# EAGLE board blimpy-1.0-B (EAGLE 9.5.0)
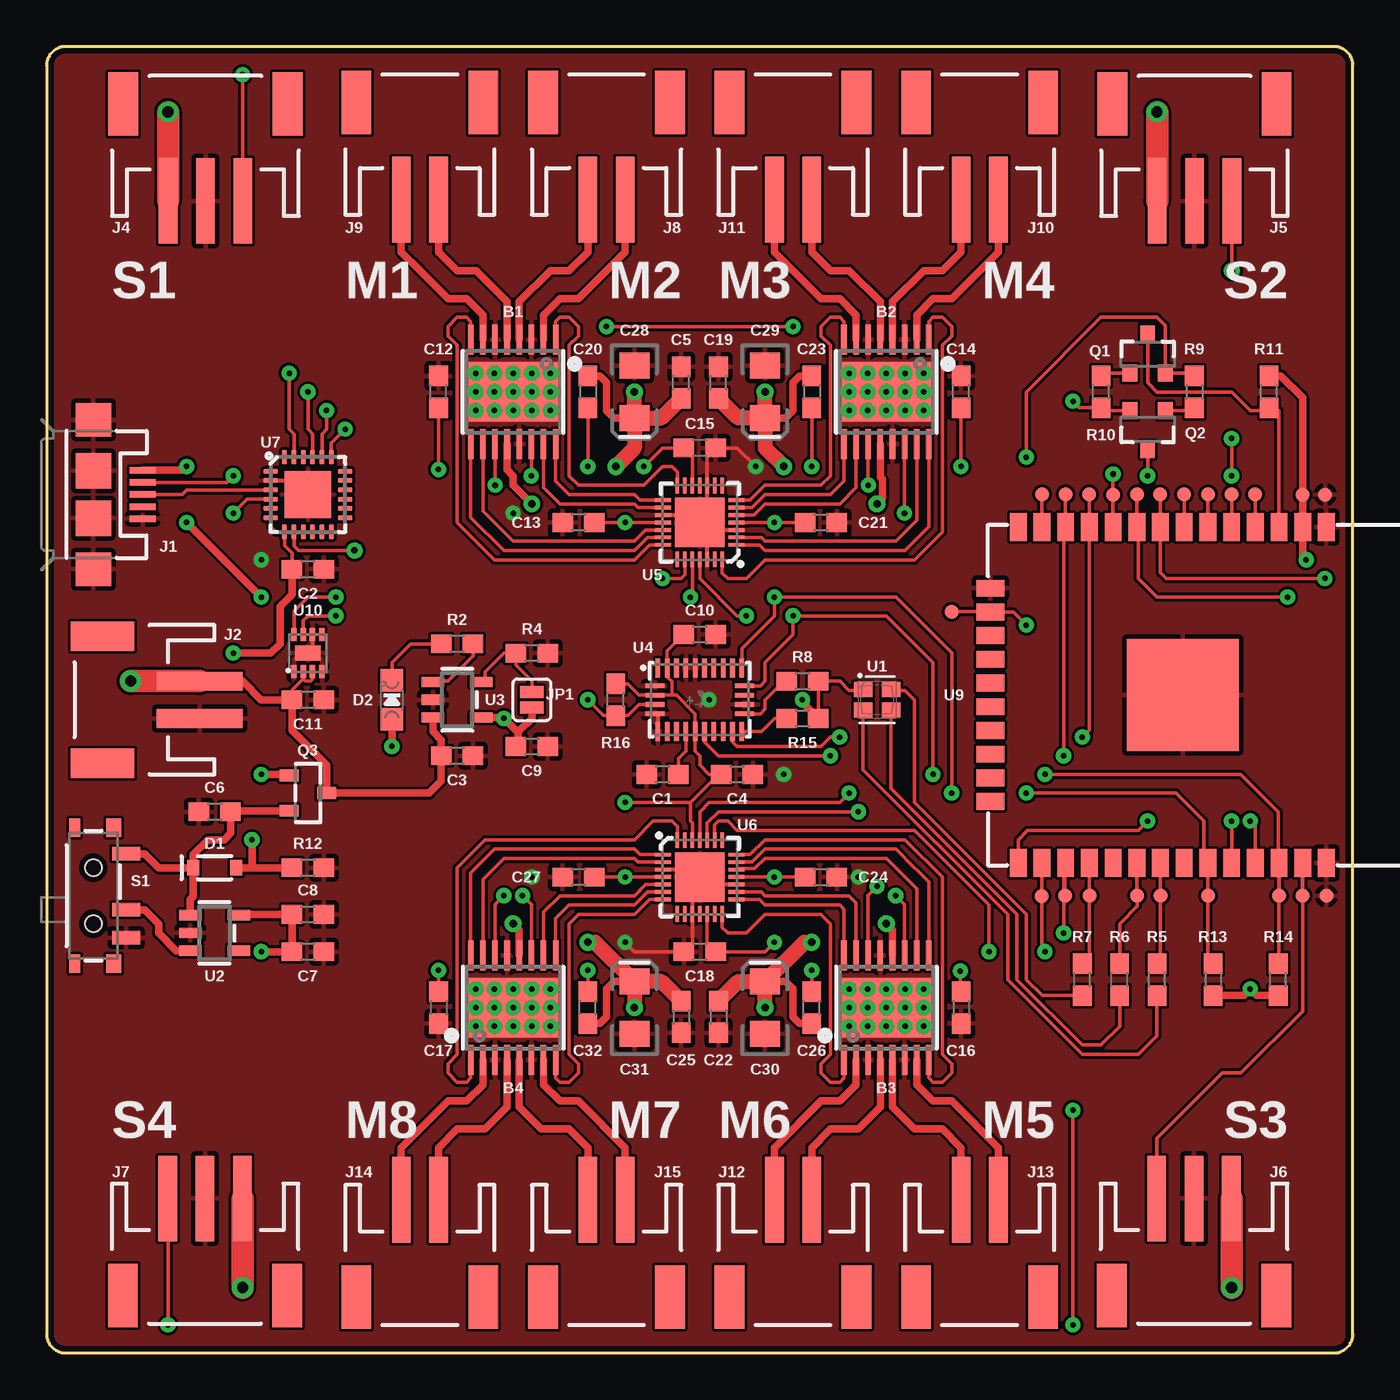
[diagram p0: board, top side]
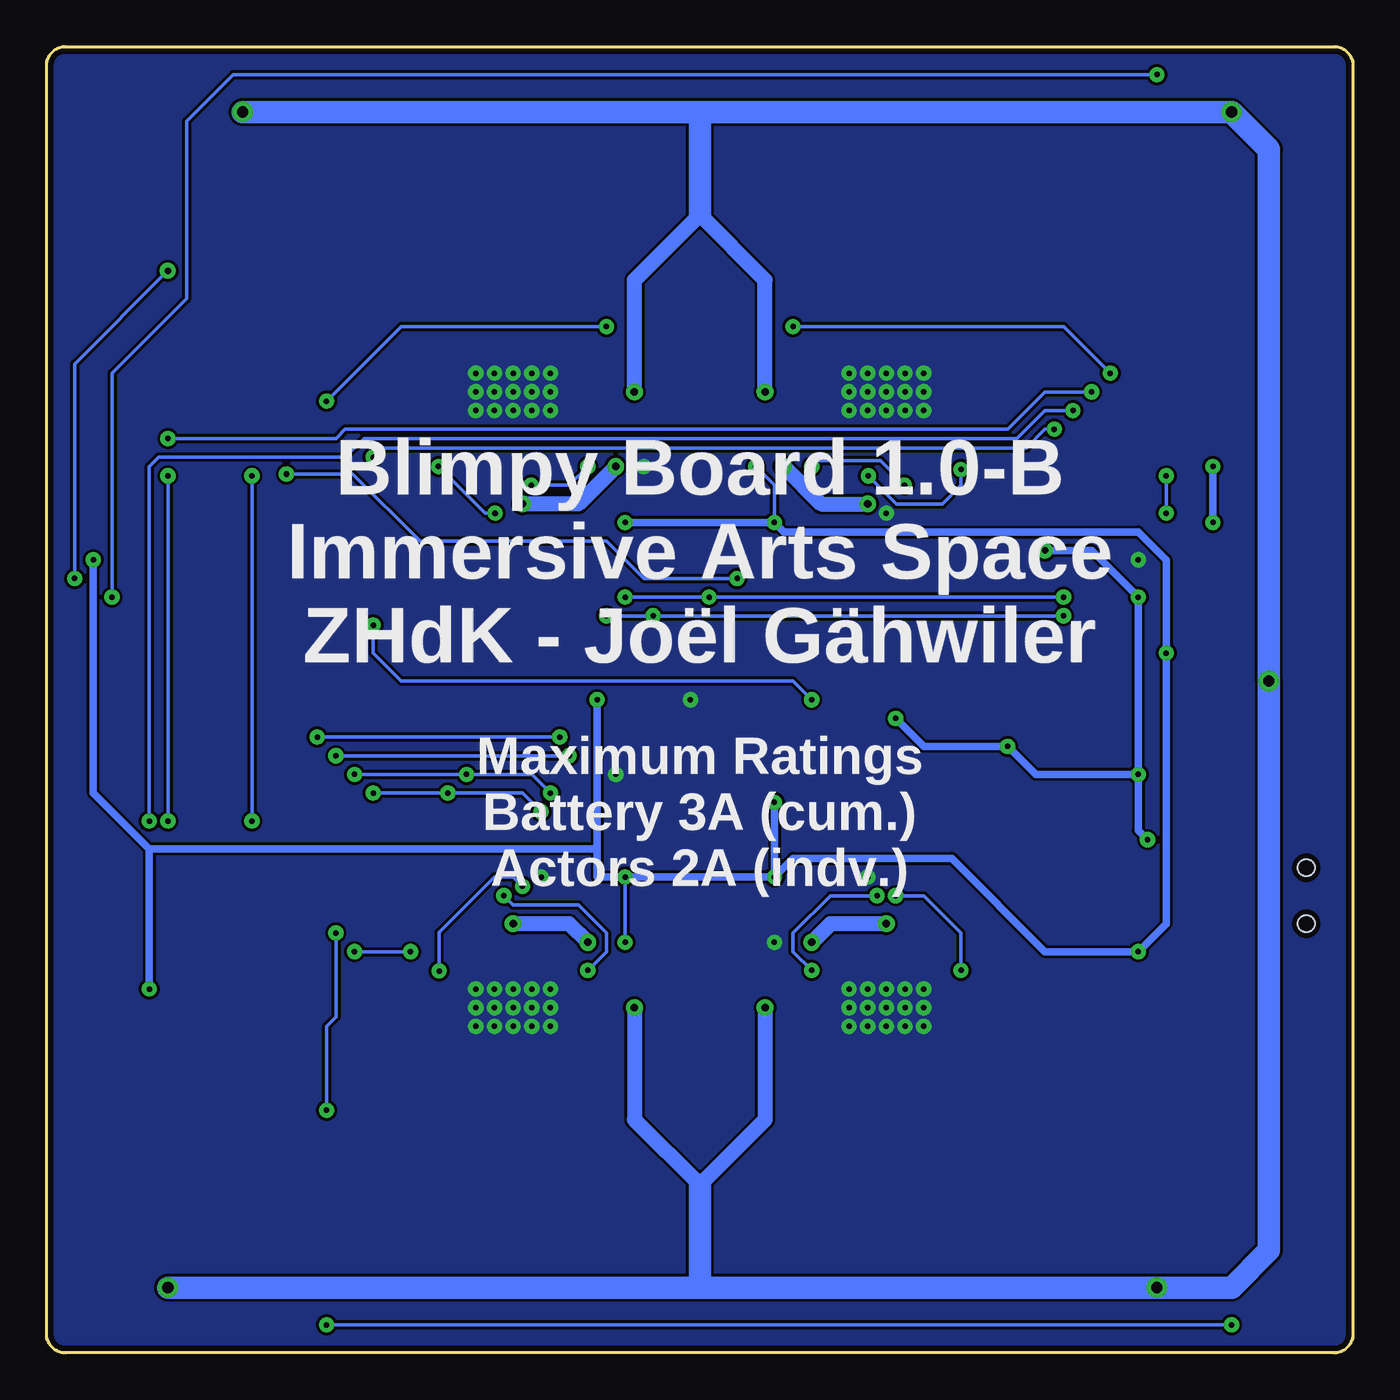
[diagram p1: board, bottom side, seen from below]

Size 70 x 70 mm. Coordinates in mm from the lower left corner, seen from the top.
Outline: 69,0 arc90 70,1 70,69 arc90 69,70 1,70 arc90 0,69 0,1 arc90 1,0 69,0
Copper layers (1*16): Top 0.035mm / dielectric 1mm / Bottom 0.035mm
Design rules "SparkFun-2-layer-STANDARD *": minimum track width 6mil, minimum drill 0.3mm, track to track 6mil, track to pad 6mil, pad to pad 6mil, via to via 6mil, smd to smd 6mil, copper to edge 12mil, drill to drill 12mil, minimum pad ring 10mil, minimum via ring 10mil, stop-mask expansion 4mil, vias tented up to drill 25mil, thermal gap 10mil

## Footprints (pad centres in the part's own frame; a part is rotated, then mirrored left to right if it is on the bottom)
HTSSOP16 = smd 0.3 x 1.6: 1 -2.275,-2.8; 2 -1.625,-2.8; 3 -0.975,-2.8; 4 -0.325,-2.8; 5 0.325,-2.8; 6 0.975,-2.8; 7 1.625,-2.8; 8 2.275,-2.8; 9 2.275,2.8; 10 1.625,2.8; 11 0.975,2.8; 12 0.325,2.8; 13 -0.325,2.8; 14 -0.975,2.8; 15 -1.625,2.8; 16 -2.275,2.8 | smd 4.8 x 3.2: PPAD 0,0
0603 = smd 1.1 x 1: 1 -0.85,0; 2 0.85,0
EIA3216 = smd 1.4 x 1.6: + 1.4,0; - -1.4,0
SOD-323 = smd 0.63 x 0.83: A 1.15,0; C -1.15,0
CHIPLED_0805_NOOUTLINE = smd 1.2 x 1.2: A 0,-1.05; C 0,1.05
USB-MICROB = smd 1.4 x 0.35: D+ -2.65,0; D- -2.65,-0.65; GND -2.65,1.3; ID -2.65,0.65; VBUS -2.65,-1.3 | smd 1.9 x 1.8: MT1 0,-4; MT2 0,4 | smd 1.9 x 1.9: P$1 0,-1.27; P$2 0,1.27
JST-2-SMD = smd 1 x 4.6: 1 -1,-3.7; 2 1,-3.7 | smd 1.6 x 3.4: NC1 -3.4,1.5; NC2 3.4,1.5
JST-3-SMD = smd 1 x 4.6: 1 -1.99,-4.77; 2 0.01,-4.77; 3 2.01,-4.77 | smd 1.6 x 3.4: NC1 -4.39,0.43; NC2 4.41,0.43
SMT-JUMPER_2_NO_SILK = smd 0.635 x 1.27: 1 -0.406,0; 2 0.406,0
SOT23-3 = smd 0.8 x 0.9: 1 -0.95,-1; 2 0.95,-1; 3 0,1.1
SOT23-R = smd 0.635 x 1.016: 1 -0.95,-1; 2 0.95,-1; 3 0,1
SWITCH_SPST_SMD_A = smd 0.7 x 1.5: 1 -2.25,-1.75; 2 -0.75,-1.75; 3 2.25,-1.75 | smd 1 x 0.6: GND1 -3.65,1; GND3 3.65,1 | smd 1 x 0.8: GND2 -3.65,-1.1; GND4 3.65,-1.1 | hole 0.9: -1.5,0; 1.5,0
PAD.03X.03 = smd 0.762 x 0.762: P$1 0,0
PLCC4-2MM-RGB = smd 1 x 0.8: BLUE -0.75,-0.55; CA 0.75,-0.55; GREEN -0.75,0.55; RED 0.75,0.55
SOT23-5 = smd 0.55 x 1.2: 1 -0.95,-1.3; 2 0,-1.3; 3 0.95,-1.3; 4 0.95,1.3; 5 -0.95,1.3
LGA-28 = smd 1 x 0.25: 1 1.7,2.25; 6 -1.7,2.25; 7 -1.7,1.75; 8 -1.7,1.25; 9 -1.7,0.75; 10 -1.7,0.25; 11 -1.7,-0.25; 12 -1.7,-0.75; 13 -1.7,-1.25; 14 -1.7,-1.75; 15 -1.7,-2.25; 20 1.7,-2.25; 21 1.7,-1.75; 22 1.7,-1.25; 23 1.7,-0.75; 24 1.7,-0.25; 25 1.7,0.25; 26 1.7,0.75; 27 1.7,1.25; 28 1.7,1.75 | smd 0.25 x 1: 2 0.75,2.4; 3 0.25,2.4; 4 -0.25,2.4; 5 -0.75,2.4; 16 -0.75,-2.4; 17 -0.25,-2.4; 18 0.25,-2.4; 19 0.75,-2.4
QFN-28 = smd 0.85 x 0.2: 1 -1.975,1.2; 2 -1.975,0.8; 3 -1.975,0.4; 4 -1.975,0; 5 -1.975,-0.4; 6 -1.975,-0.8; 7 -1.975,-1.2; 15 1.975,-1.2; 16 1.975,-0.8; 17 1.975,-0.4; 18 1.975,0; 19 1.975,0.4; 20 1.975,0.8; 21 1.975,1.2 | smd 0.2 x 0.85: 8 -1.2,-1.975; 9 -0.8,-1.975; 10 -0.4,-1.975; 11 0,-1.975; 12 0.4,-1.975; 13 0.8,-1.975; 14 1.2,-1.975; 22 1.2,1.975; 23 0.8,1.975; 24 0.4,1.975; 25 0,1.975; 26 -0.4,1.975; 27 -0.8,1.975; 28 -1.2,1.975 | smd 2.65 x 2.65: 29 0,0
QFN24_4MM_SMSC = smd 0.8 x 0.28: 1 -2,1.25; 2 -2,0.75; 3 -2,0.25; 4 -2,-0.25; 5 -2,-0.75; 6 -2,-1.25; 13 2,-1.25; 14 2,-0.75; 15 2,-0.25; 16 2,0.25; 17 2,0.75; 18 2,1.25 | smd 0.28 x 0.8: 7 -1.25,-2; 8 -0.75,-2; 9 -0.25,-2; 10 0.25,-2; 11 0.75,-2; 12 1.25,-2; 19 1.25,2; 20 0.75,2; 21 0.25,2; 22 -0.25,2; 23 -0.75,2; 24 -1.25,2 | smd 2.5 x 2.5: THERM 0,0
ESP-WROOM-32 = smd 0.9 x 1.5: 1 7.7,9; 2 6.43,9; 3 5.16,9; 4 3.89,9; 5 2.62,9; 6 1.35,9; 7 0.08,9; 8 -1.19,9; 9 -2.46,9; 10 -3.73,9; 11 -5,9; 12 -6.27,9; 13 -7.54,9; 14 -8.81,9; 25 -8.81,-9; 26 -7.54,-9; 27 -6.27,-9; 28 -5,-9; 29 -3.73,-9; 30 -2.46,-9; 31 -1.19,-9; 32 0.08,-9; 33 1.35,-9; 34 2.62,-9; 35 3.89,-9; 36 5.16,-9; 37 6.43,-9; 38 7.7,-9 | smd 1.5 x 0.9: 15 -10.3,5.715; 16 -10.3,4.445; 17 -10.3,3.175; 18 -10.3,1.905; 19 -10.3,0.635; 20 -10.3,-0.635; 21 -10.3,-1.905; 22 -10.3,-3.175; 23 -10.3,-4.445; 24 -10.3,-5.715 | smd 6 x 6: GND 0,0
DFN-8 = smd 0.3 x 0.7: P$1 -0.75,-0.99; P$2 -0.25,-0.99; P$3 0.25,-0.99; P$4 0.75,-0.99; P$5 0.75,0.99; P$6 0.25,0.99; P$7 -0.25,0.99; P$8 -0.75,0.99 | smd 1.38 x 0.8: P$9 0,0

## Placement (x,y rotation side)
B1  DRV8833PWPR  [HTSSOP16]  25,51.5 180 top
B2  DRV8833PWPR  [HTSSOP16]  45,51.5 180 top
B3  DRV8833PWPR  [HTSSOP16]  45,18.5 0 top
B4  DRV8833PWPR  [HTSSOP16]  25,18.5 0 top
C1  0.1uF  [0603]  33,31 180 top
C2  10uF  [0603]  14,42 0 top
C3  10uF  [0603]  22,32 0 top
C4  0.1uF  [0603]  37,31 0 top
C5  0.1uF  [0603]  34,52 90 top
C6  10uF  [0603]  9,29 180 top
C7  1.0uF  [0603]  14,21.5 0 top
C8  10uF  [0603]  14,23.5 0 top
C9  10uF  [0603]  26,32.5 0 top
C10  0.1uF  [0603]  35,38.5 0 top
C11  0.1uF  [0603]  14,35 0 top
C12  10uF  [0603]  21,51.5 90 top
C13  0.1uF  [0603]  28.5,44.5 180 top
C14  10uF  [0603]  49,51.5 90 top
C15  0.1uF  [0603]  35,48.5 0 top
C16  10uF  [0603]  49,18.5 270 top
C17  10uF  [0603]  21,18.5 270 top
C18  0.1uF  [0603]  35,21.5 180 top
C19  0.1uF  [0603]  36,52 90 top
C20  0.1uF  [0603]  29,51.5 270 top
C21  0.1uF  [0603]  41.5,44.5 0 top
C22  0.1uF  [0603]  36,18 270 top
C23  0.1uF  [0603]  41,51.5 270 top
C24  0.1uF  [0603]  41.5,25.5 0 top
C25  0.1uF  [0603]  34,18 270 top
C26  0.1uF  [0603]  41,18.5 90 top
C27  0.1uF  [0603]  28.5,25.5 180 top
C28  10uF  [EIA3216]  31.5,51.5 270 top
C29  10uF  [EIA3216]  38.5,51.5 270 top
C30  10uF  [EIA3216]  38.5,18.5 90 top
C31  10uF  [EIA3216]  31.5,18.5 90 top
C32  0.1uF  [0603]  29,18.5 90 top
D1  1A/23V/620mV  [SOD-323]  9,26 0 top
D2  ORANGE  [CHIPLED_0805_NOOUTLINE]  18.5,35 0 top
J1  MICRO-USB  [USB-MICROB]  2.5,46 180 top
J2  [JST-2-SMD]  4.5,35 90 top
J4  3-PIN SMD  [JST-3-SMD]  8.5,66.5 0 top
J5  3-PIN SMD  [JST-3-SMD]  61.5,66.5 0 top
J6  3-PIN SMD  [JST-3-SMD]  61.5,3.5 180 top
J7  3-PIN SMD  [JST-3-SMD]  8.5,3.5 180 top
J8  [JST-2-SMD]  30,65.5 0 top
J9  [JST-2-SMD]  20,65.5 0 top
J10  [JST-2-SMD]  50,65.5 0 top
J11  [JST-2-SMD]  40,65.5 0 top
J12  [JST-2-SMD]  40,4.5 180 top
J13  [JST-2-SMD]  50,4.5 180 top
J14  [JST-2-SMD]  20,4.5 180 top
J15  [JST-2-SMD]  30,4.5 180 top
JP1  JUMPER-SMT_2_NO_SILK  [SMT-JUMPER_2_NO_SILK]  26,35 270 top
Q1  mmbt2222  [SOT23-3]  59,53.5 0 top
Q2  mmbt2222  [SOT23-3]  59,49.5 180 top
Q3  DMG3415U  [SOT23-R]  14,30 270 top
R2  1k  [0603]  22,38 0 top
R4  2.0k  [0603]  26,37.5 180 top
R5  1k  [0603]  59.5,20 90 top
R6  1k  [0603]  57.5,20 90 top
R7  1k  [0603]  55.5,20 90 top
R8  4.7k  [0603]  40.5,36 0 top
R9  10k  [0603]  61.5,51.5 270 top
R10  10k  [0603]  56.5,51.5 90 top
R11  10k  [0603]  65.5,51.5 90 top
R12  100k  [0603]  14,26 180 top
R13  4.7k  [0603]  62.5,20 270 top
R14  4.7k  [0603]  66,20 90 top
R15  4.7k  [0603]  40.5,34 0 top
R16  10k  [0603]  30.5,35 90 top
S1  PWR  [SWITCH_SPST_SMD_A]  2.5,24.5 90 top
TP1  TEST-POINT3  [PAD.03X.03]  59.68,46 0 top
TP2  TEST-POINT3  [PAD.03X.03]  58.44,46.01 0 top
TP3  TEST-POINT3  [PAD.03X.03]  57.15,45.99 0 top
TP4  TEST-POINT3  [PAD.03X.03]  55.88,46 0 top
TP5  TEST-POINT3  [PAD.03X.03]  54.6,46.01 0 top
TP6  TEST-POINT3  [PAD.03X.03]  53.35,46.01 0 top
TP7  TEST-POINT3  [PAD.03X.03]  60.96,46.01 0 top
TP8  TEST-POINT3  [PAD.03X.03]  62.24,46.01 0 top
TP9  TEST-POINT3  [PAD.03X.03]  63.5,46 0 top
TP10  TEST-POINT3  [PAD.03X.03]  64.77,46 0 top
TP11  TEST-POINT3  [PAD.03X.03]  67.3,45.99 0 top
TP12  TEST-POINT3  [PAD.03X.03]  68.52,45.99 0 top
TP13  TEST-POINT3  [PAD.03X.03]  68.58,24.49 0 top
TP14  TEST-POINT3  [PAD.03X.03]  67.3,24.51 0 top
TP15  TEST-POINT3  [PAD.03X.03]  54.58,24.51 0 top
TP16  TEST-POINT3  [PAD.03X.03]  53.33,24.48 0 top
TP17  TEST-POINT3  [PAD.03X.03]  48.49,39.72 0 top
TP18  TEST-POINT3  [PAD.03X.03]  66.06,24.5 0 top
TP19  TEST-POINT3  [PAD.03X.03]  62.23,24.5 0 top
TP20  TEST-POINT3  [PAD.03X.03]  59.69,24.5 0 top
TP21  TEST-POINT3  [PAD.03X.03]  58.43,24.5 0 top
TP22  TEST-POINT3  [PAD.03X.03]  55.88,24.51 0 top
U1  RGB  [PLCC4-2MM-RGB]  44.5,35 180 top
U2  AP2112-3.3  [SOT23-5]  9,22.5 270 top
U3  MCP73831T-2  [SOT23-5]  22,35 270 top
U4  BNO080  [LGA-28]  35,35 90 top
U5  SX1509  [QFN-28]  35,44.5 180 top
U6  SX1509  [QFN-28]  35,25.5 0 top
U7  CP2104  [QFN24_4MM_SMSC]  14,46 0 top
U9  ESP-WROOM-32  [ESP-WROOM-32]  60.88,35.26 0 top
U10  MAX17048  [DFN-8]  14,37.5 0 top

## Library data of the parts
B1-B4 D2 Q3 U2 U3 U7 = microbuilder
C1 C4 C5 C10 C11 C13 C15 C18-C27 C32 = SparkFun-Capacitors; PROD_ID: CAP-08604
C2 C3 C6 C8 C9 C12 C14 C16 C17 = SparkFun-Capacitors; PROD_ID: CAP-11015
C7 = SparkFun-Capacitors; PROD_ID: CAP-00868
C28-C31 = SparkFun-Capacitors; PROD_ID: CAP-00811
D1 = SparkFun-DiscreteSemi; PROD_ID: DIO-11623
J1 = SparkFun-Connectors; PROD_ID: CONN-09505; SF_ID: PRT-08533
J2 J8-J15 = SparkFun-Connectors; PROD_ID: CONN-11443
J4-J7 = SparkFun-Connectors; PROD_ID: CONN-12591
JP1 = SparkFun-Jumpers
Q1 Q2 = SparkFun
R2 R5-R7 = SparkFun-Resistors; PROD_ID: RES-07856
R4 = SparkFun-Resistors; PROD_ID: RES-08296
R8 R13-R15 = SparkFun-Resistors; PROD_ID: RES-07857
R9-R11 R16 = SparkFun-Resistors; PROD_ID: RES-00824
R12 = SparkFun-Resistors; PROD_ID: RES-07828
S1 = SparkFun-Switches; PROD_ID: SWCH-10651; SF_SKU: COM-10860
TP1-TP22 = SparkFun-Connectors
U1 = Particle
U4 = BNO080
U5 U6 = SparkFun-IC-Special-Function; PROD_ID: IC-11311
U9 = ESP32
U10 = SparkFun-IC-Power; PROD_ID: IC-12551

## Nets
3.3V: C2.1 C4.1 C7.1 C8.1 C10.1 C13.1 C15.1 C18.1 C21.1 C24.1 C27.1 R8.2 R11.2 R13.2 R14.1 R15.2 R16.2 TP11.P$1 U1.CA U2.5 U4.3 U4.10 U4.28 U5.4 U5.12 U5.18 U6.4 U6.12 U6.18 U6.26 U7.5 U7.6 U7.7 U9.2
B1-AIN1: B1.16 U5.15
B1-AIN2: B1.15 U5.16
B1-BIN1: B1.9 U5.20
B1-BIN2: B1.10 U5.19
B1-FAULT: B1.8 U5.21
B1-SLEEP: B1.1 U5.14
B2-AIN1: B2.16 U5.1
B2-AIN2: B2.15 U5.2
B2-BIN1: B2.9 U5.6
B2-BIN2: B2.10 U5.5
B2-FAULT: B2.8 U5.7
B2-SLEEP: B2.1 U5.28
B3-AIN1: B3.16 U6.15
B3-AIN2: B3.15 U6.16
B3-BIN1: B3.9 U6.20
B3-BIN2: B3.10 U6.19
B3-FAULT: B3.8 U6.21
B3-SLEEP: B3.1 U6.14
B4-AIN1: B4.16 U6.1
B4-AIN2: B4.15 U6.2
B4-BIN1: B4.9 U6.6
B4-BIN2: B4.10 U6.5
B4-FAULT: B4.8 U6.7
B4-SLEEP: B4.1 U6.28
BLUE: R7.2 TP22.P$1 U9.28
BOOT-SEL: Q2.3 U9.25
CHIP-EN: Q1.3 R11.1 U9.3
DTR: Q2.2 R10.1 U7.23
GND: B1.3 B1.6 B1.13 B1.PPAD B2.3 B2.6 B2.13 B2.PPAD B3.3 B3.6 B3.13 B3.PPAD B4.3 B4.6 B4.13 B4.PPAD C1.2 C2.2 C3.2 C4.2 C5.2 C6.2 C7.2 C8.2 C9.2 C10.2 C11.2 C12.2 C13.2 C14.2 C15.2 C16.2 C17.2 C18.2 C19.2 C21.2 C22.2 C24.2 C25.2 C27.2 C28.- C29.- C30.- C31.- J1.GND J1.MT1 J1.MT2 J1.P$1 J1.P$2 J2.1 J4.2 J5.2 J6.2 J7.2 R4.1 R12.1 S1.1 TP12.P$1 TP13.P$1 U2.2 U3.2 U4.2 U4.5 U4.6 U4.17 U4.25 U4.26 U5.3 U5.10 U5.17 U5.26 U5.29 U6.3 U6.10 U6.17 U6.29 U7.2 U7.THERM U9.1 U9.15 U9.38 U9.GND U10.P$1 U10.P$4 U10.P$6 U10.P$9
GREEN: R6.2 TP21.P$1 U9.30
IMU-BOOT: R16.1 TP17.P$1 U4.4 U9.16
IMU-INT: TP4.P$1 U4.14 U9.11
IMU-RST: TP5.P$1 U4.11 U9.12
IO1-RST: TP3.P$1 U5.23 U9.10
IO2-RST: TP16.P$1 U6.23 U9.26
N$1: D2.C R2.1
N$2: J1.D+ U7.3
N$3: R2.2 U3.1
N$4: JP1.1 R4.2 U3.5
N$6: J1.D- U7.4
N$7: C6.1 D1.C Q3.2 S1.3 U2.1
N$8: S1.2 U2.3
N$9: R5.1 U1.RED
N$10: R7.1 U1.BLUE
N$11: R6.1 U1.GREEN
N$12: Q1.1 R10.2
N$13: Q2.1 R9.2
N$14: R8.1 U4.16
N$15: R15.1 U4.15
N$16: C1.1 U4.9
N$18: TP10.P$1 U9.4
N$19: TP9.P$1 U9.5
N$20: TP8.P$1 U9.6
N$21: TP7.P$1 U9.7
N$22: TP6.P$1 U9.13
N$37: B1.2 J8.2
N$46: B1.4 J8.1
N$47: B1.7 J9.1
N$48: B1.5 J9.2
N$49: B2.2 J10.2
N$50: B2.4 J10.1
N$51: B2.7 J11.1
N$52: B2.5 J11.2
N$53: B3.2 J12.2
N$54: B3.4 J12.1
N$55: B3.7 J13.1
N$56: B3.5 J13.2
N$57: B4.2 J14.2
N$58: B4.4 J14.1
N$59: B4.7 J15.1
N$60: B4.5 J15.2
N$61: B1.14 C12.1
N$62: B2.14 C14.1
N$63: B4.14 C17.1
N$64: B1.11 C20.2
N$65: B3.14 C16.1
N$66: B2.11 C23.2
N$69: B3.11 C26.2
N$70: B4.11 C32.2
RED: R5.2 TP20.P$1 U9.31
RTS: Q1.2 R9.1 U7.19
RX: U7.21 U9.34
S1-SIG: J4.3 TP2.P$1 U9.9
S2-SIG: J5.3 TP1.P$1 U9.8
S3-SIG: J6.3 TP14.P$1 U9.37
S4-SIG: J7.3 TP15.P$1 U9.27
SCL: R14.2 TP18.P$1 U4.19 U5.25 U6.25 U9.36 U10.P$7
SDA: R13.1 TP19.P$1 U4.20 U5.24 U6.24 U9.33 U10.P$8
TX: U7.20 U9.35
V_BATT: B1.12 B2.12 B3.12 B4.12 C3.1 C5.1 C11.1 C19.1 C20.1 C22.1 C23.1 C25.1 C26.1 C28.+ C29.+ C30.+ C31.+ C32.1 J2.2 J4.1 J5.1 J6.1 J7.1 Q3.3 U3.3 U10.P$2 U10.P$3
V_USB: C9.1 D1.A D2.A J1.VBUS JP1.2 Q3.1 R12.2 U3.4 U7.8

## Tracks (layer width: path | path; a pad name or v marks a point on that pad's centre or on a via)
3.3V  (via drill 0.3)
  Top 0.2: U6.26 34.6,28.4 34.5,28.5 34.5,29.5 | U5.18 v31,44.5 C13.1 | U5.4 v39,44.5 C21.1 | v32,47.5 33,48.5 C15.1 34.6,48.05 U5.12 | U6.12 35.4,21.95 C18.1 38.5,21.5 v39,22 | U6.18 v39,25.5 C24.1 | U6.4 v31,25.5 C27.1 | U7.5 U7.6 12,44.28 12.28,44 U7.7 12.75,43.25 13.15,42.85 C2.1 | R16.2 31.15,35.85 31.75,35.25 U4.3 33.5,35.25 | R15.2 R8.2 42.5,36 43,35.5 43.7,35.5 U1.CA | C4.1 36,31 | 36,31 35.5,31 35,31.5 35,32 34.75,32.25 U4.10 34.75,34.25 33.75,35.25 33.5,35.25 | C10.1 33.25,37.6 U4.28 33.25,36.22 33.5,35.97 33.5,35.25 | 36,31 34.5,29.5 | 34.5,29.5 v31,29.5 | TP11.P$1 67.31,45.98 U9.2
  Top 0.4: U2.5 10.35,23.5 C8.1 C7.1 v11.5,21.5 | v10,37.5 12,37.5 12.5,38 12.5,40 13.15,40.65 C2.1 | R11.2 66.15,52.35 67.31,51.19 U9.2 67.31,42.69 v67.5,42.5 | v40.5,35 40.5,34.85 R15.2 | R13.2 64.15,19.15 v64.5,19.5 64.85,19.15 R14.1
  Bottom 0.2: v31,44.5 31,46.5 v32,47.5 | v39,25.5 v39,22
  Bottom 0.4: v39,44.5 v31,44.5 30.5,44 11.5,44 10,42.5 v10,37.5 10,23 v11.5,21.5 16.5,21.5 21.5,26.5 30,26.5 v31,25.5 | v31,25.5 v39,25.5 40.5,25.5 40.5,27 | v31,29.5 v31,25.5 | v40.5,35 40.5,27 | 40.5,27 64.5,27 | 64.5,27 v64.5,19.5 | 64.5,27 67.5,30 v67.5,42.5
B1-AIN1
  Top 0.2: U5.15 31.8,45.7 31.5,46 28,46 27.27,46.73 B1.16
B1-AIN2
  Top 0.2: U5.16 31.7,45.3 31.5,45.5 27.5,45.5 26.62,46.38 B1.15
B1-BIN1
  Top 0.2: U5.20 32.2,43.7 31.5,43 24.5,43 22.73,44.77 B1.9
B1-BIN2
  Top 0.2: U5.19 32.1,44.1 31.5,43.5 25,43.5 23.38,45.12 B1.10
B1-FAULT
  Top 0.2: B1.8 22.73,55.27 22.5,55.5 22,55.5 21.5,55 21.5,54.5 22,54 22,44.5 24,42.5 31.5,42.5 32.3,43.3 U5.21
B1-SLEEP
  Top 0.2: B1.1 27.27,55.27 27.5,55.5 28,55.5 28.5,55 28.5,54.5 28,54 28,47 28.5,46.5 32,46.5 33,47.5 33.5,47.5 33.8,47.2 U5.14
B2-AIN1
  Top 0.2: U5.1 38.2,43.3 38.5,43 46,43 47.27,44.27 B2.16
B2-AIN2
  Top 0.2: U5.2 38.3,43.7 38.5,43.5 45.5,43.5 46.5,44.5 46.62,44.62 B2.15
B2-BIN1
  Top 0.2: U5.6 37.8,45.3 38.5,46 42,46 42.73,46.73 B2.9
B2-BIN2
  Top 0.2: U5.5 37.9,44.9 38.5,45.5 42.5,45.5 43.38,46.38 B2.10
B2-FAULT
  Top 0.2: B2.8 42.73,55.27 42.5,55.5 42,55.5 41.5,55 41.5,54.5 42,54 42,47 41.5,46.5 38.5,46.5 37.7,45.7 U5.7
B2-SLEEP
  Top 0.2: B2.1 47.27,55.27 47.5,55.5 48,55.5 48.5,55 48.5,54.5 48,54 48,44 46.5,42.5 38.5,42.5 37.5,41.5 36.5,41.5 36.2,41.8 U5.28
B3-AIN1
  Top 0.2: U6.15 38.2,24.3 38.5,24 42.5,24 42.73,23.77 B3.16
B3-AIN2
  Top 0.2: U6.16 38.3,24.7 38.5,24.5 43,24.5 43.38,24.12 B3.15
B3-BIN1
  Top 0.2: U6.20 37.8,26.3 38.5,27 45.5,27 46.5,26 46.62,25.88 47.27,25.23 B3.9
B3-BIN2
  Top 0.2: B3.10 46.62,22.5 46.62,22.62 46.62,24.88 45,26.5 38.5,26.5 37.95,25.95 37.02,25.95 U6.19
B3-FAULT
  Top 0.2: B3.8 47.27,14.72 47.5,14.5 48,14.5 48.5,15 48.5,15.5 48,16 48,25.5 46,27.5 38.5,27.5 37.7,26.7 U6.21
B3-SLEEP
  Top 0.2: B3.1 42.73,14.72 42.5,14.5 42,14.5 41.5,15 41.5,15.5 42,16 42,23 41.5,23.5 38.5,23.5 37.5,22.5 36.5,22.5 36.2,22.8 U6.14
B4-AIN1
  Top 0.2: U6.1 31.8,26.7 31.5,27 24,27 22.73,25.73 B4.16
B4-AIN2
  Top 0.2: U6.2 31.7,26.3 31.5,26.5 24.5,26.5 23.38,25.38 B4.15
B4-BIN1
  Top 0.2: B4.9 27.27,23.27 28,24 31.5,24 32.2,24.7 U6.6
B4-BIN2
  Top 0.2: B4.10 26.62,23.62 27.5,24.5 31.5,24.5 32.1,25.1 U6.5
B4-FAULT
  Top 0.2: B4.8 27.27,14.72 27.5,14.5 28,14.5 28.5,15 28.5,15.5 28,16 28,23 28.5,23.5 31.5,23.5 32.3,24.3 U6.7
B4-SLEEP
  Top 0.2: B4.1 22.73,14.72 22.5,14.5 22,14.5 21.5,15 21.5,15.5 22,16 22,26 23.5,27.5 31.5,27.5 32.5,28.5 33.5,28.5 33.8,28.2 U6.28
BLUE
  Top 0.2: U9.28 | U9.28 55.89,21.24 R7.2 | TP22.P$1 55.88,26.25 U9.28
BOOT-SEL  (via drill 0.3)
  Top 0.2: Q2.3 v59,47 | v59,28.5 58.5,28 52.57,28 52.07,27.5 U9.25
  Bottom 0.2: v59,47 v59,28.5
CHIP-EN
  Top 0.2: R11.1 65.54,50.61 65.54,50.5 | U9.3 66.04,50.5 65.54,50.5 | 65.54,50.5 64.5,50.5 63.5,51.5 59.5,51.5 59,52 Q1.3
DTR  (via drill 0.3)
  Top 0.2: Q2.2 56.65,50.5 R10.1 55.35,50.65 v55,51 | U7.23 13.25,49.25 13,49.5 v13,52.5 | v30,55 v40,55
  Bottom 0.2: v55,51 51,55 v40,55 | v30,55 15.5,55 v13,52.5
GND  (via drill 0.3)
  Top 0.2: U5.29 34.6,44.9 U5.17 | U5.29 35.4,44.9 U5.10 35.4,48.05 C15.2 37,48.5 v38,47.5 | U5.3 35.4,44.1 | U5.26 35.4,44.1 | 35.4,44.1 U5.29 | U6.3 34.6,25.9 U6.29 | U6.17 35.4,25.1 U6.29 | U6.29 34.6,25.1 U6.10 34.6,21.95 C18.2 31.5,21.5 v31,22 | U7.2 13.25,46.75 U7.THERM | U10.P$6 14.25,37.75 U10.P$9 | U4.5 32.75,34.1 U4.6
  other vias: 35.5,35 39.5,31 11.5,42.5 25,18.5 45,18.5 25,51.5 45,51.5 23,19.5 24,19.5 25,19.5 26,19.5 27,19.5 27,18.5 27,17.5 26,17.5 25,17.5 26,18.5 24,18.5 24,17.5 23,18.5 23,17.5 43,19.5 44,19.5 45,19.5 46,19.5 47,19.5 43,18.5 44,18.5 46,18.5 47,18.5 43,17.5 44,17.5 45,17.5 46,17.5 47,17.5 23,52.5 24,52.5 25,52.5 26,52.5 27,52.5 23,51.5 24,51.5 26,51.5 27,51.5 43,52.5 44,52.5 45,52.5 46,52.5 47,52.5 43,51.5 44,51.5 46,51.5 47,51.5 23,50.5 24,50.5 25,50.5 26,50.5 27,50.5 43,50.5 44,50.5 45,50.5 46,50.5 47,50.5 26,25.5 43.5,25.5 25,45
  pour Top: -0.5,70.5 70.5,70.5 70.5,-0.5 -0.5,-0.5
  pour Bottom: -1,71 71,71 71,-1 -1,-1
GREEN
  Top 0.2: R6.2 57.5,23 58.44,23.94 58.44,24.49 TP21.P$1 58.43,26.25 U9.30
IMU-BOOT  (via drill 0.3)
  Top 0.2: U4.4 31.75,34.75 31.15,34.15 R16.1 29.85,34.15 v29,35 | v52.5,39 51.8,39.7 U9.16 50.57,39.72 TP17.P$1
  Bottom 0.2: v52.5,39 52.5,37.5 51,36 30,36 v29,35
IMU-INT  (via drill 0.3)
  Top 0.2: U4.14 36.75,32.75 37,32.5 41.5,32.5 42,33 v42.5,33 | v55.5,33 55.88,33.38 U9.11 TP4.P$1
  Bottom 0.2: v42.5,33 v55.5,33
IMU-RST  (via drill 0.3)
  Top 0.2: U4.11 35.25,32.75 36,32 v42,32 | v54.5,32 54.5,44.15 54.6,44.25 | 54.6,44.25 U9.12 | TP5.P$1 54.6,44.25
  Bottom 0.2: v42,32 v54.5,32
IO1-RST  (via drill 0.3)
  Top 0.2: U9.10 TP3.P$1 v57.15,47.09 | U5.23 34.2,41.7 34,41.5 v33,41.5
  Bottom 0.2: v33,41.5 38,41.5 40,43.5 50,43.5 53.59,47.09 v57.15,47.09
IO2-RST  (via drill 0.3)
  Top 0.2: U6.23 35.8,28.3 36,28.5 36.5,28.5 37,28 46.5,28 50.5,24 v50.5,21.5 | U9.26 TP16.P$1 53.33,21.67 v53.5,21.5
  Bottom 0.2: v50.5,21.5 v53.5,21.5
N$1
  Top 0.2: D2.C 18.5,37 19.5,38 R2.1
N$2
  Top 0.2: U7.3 7.5,46.25 7.25,46 J1.D+
N$3
  Top 0.2: U3.1 20.75,36 21.5,36 22.85,37.35 R2.2
N$4
  Top 0.2: U3.5 23.5,36.15 23.5,36.5 24.5,37.5 R4.2 25.15,36.85 26,36 JP1.1
N$6  (via drill 0.3)
  Top 0.2: U7.4 10.75,45.75 v10,45 | J1.D- 9.65,46.65 v10,47
  Bottom 0.2: v10,47 v10,45
N$7
  Top 0.4: S1.3 5.25,26.75 6,26 D1.C | U2.1 7.7,24.3 7.85,24.45 D1.C | Q3.2 9.9,29.05 C6.1 9.85,27.85 9.5,27.5 8.65,27.5 7.85,26.7 D1.C
N$8
  Top 0.4: S1.2 5.25,23.75 6,23 6,22.5 6.95,21.55 U2.3
N$9
  Top 0.2: U1.RED 43.75,31.25 51.5,23.5 51.5,20 55.5,16 58.5,16 59.5,17 R5.1
N$10
  Top 0.2: U1.BLUE 45.3,35.5 46,35.5 46.5,35 46.5,29.5 52.5,23.5 52.5,20 53.35,19.15 R7.1
N$11
  Top 0.2: U1.GREEN 45.25,30.25 52,23.5 52,20 55.5,16.5 56.5,16.5 57.5,17.5 R6.1
N$12
  Top 0.2: R10.2 56.65,52.5 Q1.1
N$13
  Top 0.2: Q2.1 61.35,50.5 R9.2
N$14
  Top 0.2: U4.16 38.25,34.25 38.5,34.5 38.5,35 39.5,36 R8.1
N$15
  Top 0.2: U4.15 38.3,33.3 39,34 R15.1
N$16
  Top 0.2: U4.9 34.25,32.25 33.85,31.85 C1.1
N$18
  Top 0.2: TP10.P$1 U9.4
N$19
  Top 0.2: TP9.P$1 U9.5
N$20
  Top 0.2: TP8.P$1 U9.6
N$21
  Top 0.2: TP7.P$1 U9.7
N$22
  Top 0.2: TP6.P$1 U9.13
N$37
  Top 0.4: J8.2 31,59 28.5,56.5 27.5,56.5 26.62,55.62 B1.2
N$46
  Top 0.4: J8.1 29,59 28,58 27,58 25.32,56.33 B1.4
N$47
  Top 0.4: J9.1 19,59 20,58 21.5,56.5 22.5,56.5 23.38,55.62 B1.7
N$48
  Top 0.4: J9.2 21,59 22,58 23,58 24.68,56.33 B1.5
N$49
  Top 0.4: J10.2 51,59 48.5,56.5 47.5,56.5 46.62,55.62 B2.2
N$50
  Top 0.4: J10.1 49,59 48,58 47,58 45.33,56.33 B2.4
N$51
  Top 0.4: J11.1 39,59 41.5,56.5 42.5,56.5 43.38,55.62 B2.7
N$52
  Top 0.4: J11.2 41,59 42,58 43,58 44.67,56.33 B2.5
N$53
  Top 0.4: J12.2 39,11 41.5,13.5 42.5,13.5 43.38,14.38 B3.2
N$54
  Top 0.4: J12.1 41,11 42,12 43.5,12 44.67,13.18 B3.4
N$55
  Top 0.4: J13.1 51,11 48.5,13.5 47.5,13.5 46.62,14.38 B3.7
N$56
  Top 0.4: J13.2 49,11 48,12 46.5,12 45.33,13.18 B3.5
N$57
  Top 0.4: J14.2 19,11 21.5,13.5 22.5,13.5 23.38,14.38 B4.2
N$58
  Top 0.4: B4.4 24.68,15 24.68,14.18 24.68,13.18 23.5,12 22,12 21,11 J14.1
N$59
  Top 0.4: J15.1 31,11 28.5,13.5 27.5,13.5 26.62,14.38 B4.7
N$60
  Top 0.4: J15.2 29,11 28,12 26.5,12 25.32,13.18 B4.5
N$61  (via drill 0.3)
  Top 0.2: B1.14 v25.98,47.01 v25.97,47 | v21,47.34 C12.1
  Bottom 0.2: v25.97,47 24.47,45.5 22,45.5 21,46.5 v21,47.34
N$62  (via drill 0.3)
  Top 0.2: B2.14 v45.98,45.01 v45.97,45 | v49,47.5 C14.1
  Bottom 0.2: v45.97,45 46.5,45 v49,47.5
N$63  (via drill 0.3)
  Top 0.2: B4.14 24.02,24.02 v24.5,24.5 | C17.1 v21,20.5
  Bottom 0.2: v24.5,24.5 23,24.5 21,22.5 v21,20.5
N$64  (via drill 0.3)
  Top 0.2: B1.11 v24.02,46.51 v24.03,46.5 | v29,47.5 C20.2
  Bottom 0.2: v24.03,46.5 24.03,46.53 25.3,47.8 28.7,47.8 v29,47.5
N$65  (via drill 0.3)
  Top 0.2: B3.14 44.02,24.52 v44.5,25 | C16.1 48.97,19.39 v48.97,20.46
  Bottom 0.2: v48.97,20.46 48.97,22.54 46,25.5 45,25.5 v44.5,25
N$66  (via drill 0.3)
  Top 0.2: B2.11 v44.02,46.51 v44.03,46.5 | v41,47.5 C23.2
  Bottom 0.2: v44.03,46.5 42,46.5 v41,47.5
N$69  (via drill 0.3)
  Top 0.2: B3.11 45.98,24.02 v45.5,24.5 | C26.2 v41,20.5
  Bottom 0.2: v41,20.5 40,21.5 40,22.5 41.5,24 45,24 v45.5,24.5
N$70  (via drill 0.3)
  Top 0.2: B4.11 25.98,24.02 v25.5,24.5 | v29,20.5 C32.2
  Bottom 0.2: v25.5,24.5 28,24.5 30,22.5 30,21.5 v29,20.5
RED
  Top 0.2: R5.2 59.69,21.04 U9.31 TP20.P$1
RTS  (via drill 0.3)
  Top 0.2: R9.1 61.35,52.5 Q1.2 59.95,55.05 59.5,55.5 56.5,55.5 52.5,51.5 v52.5,48 | U7.19 15.25,48.75 v16,49.5
  Bottom 0.2: v16,49.5 16.5,49.5 17.5,48.5 52,48.5 v52.5,48
RX  (via drill 0.3)
  Top 0.2: U7.21 14.25,49.25 14,49.5 v14,51.5 | v63.5,28.5 U9.34 | v63.5,49 v63.5,47
  Bottom 0.2: v14,51.5 16.5,51.5 18.5,49.5 54,49.5 54.5,49 v63.5,49 | v63.5,47 v63.5,28.5
S1-SIG  (via drill 0.3)
  Top 0.2: v66.5,40.5 59.5,40.5 58.5,41.5 58.5,44.18 U9.9 58.44,44.28 TP2.P$1 | J4.3 v10.5,68.5
  Bottom 0.2: v66.5,40.5 66.5,52.5 62.5,56.5 62.5,66 60,68.5 v10.5,68.5
S2-SIG  (via drill 0.3, 0.35)
  Top 0.2: v68.5,41.5 60,41.5 59.69,41.81 U9.8 TP1.P$1 | v63.51,57.99 J5.3
  Bottom 0.2: v68.5,41.5 68.5,53 v63.51,57.99
S3-SIG
  Top 0.2: J6.3 59.49,11.49 63,15 64,15 67.31,18.31 U9.37 TP14.P$1
S4-SIG  (via drill 0.3)
  Top 0.2: v54.5,22.5 54.5,26.15 U9.27 54.58,26.23 TP15.P$1 | J7.3 v6.5,1.5 | v55,1.5 v55,13
  Bottom 0.2: v54.5,22.5 54.5,18 55,17.5 v55,13 | v6.5,1.5 v55,1.5
SCL  (via drill 0.3)
  Top 0.2: U6.25 35,29 35.5,29.5 42.5,29.5 v43,30 | U9.36 66.04,20.89 R14.2 | U4.19 38.25,35.75 38.5,36 38.5,37 40,38.5 v40,39.5 45,39.5 47.5,37 v47.5,31 | U10.P$7 13.75,39.25 14,39.5 v15.5,39.5 | U5.25 35,41.5 37,39.5 v37.5,39.5 | U9.36 66,26.3 66,29 64,31 v53.5,31 | U9.36 66.06,26.24 TP18.P$1
  Bottom 0.2: v15.5,39.5 v37.5,39.5 v40,39.5 | v53.5,31 v47.5,31 44,31 v43,30
SDA  (via drill 0.3)
  Top 0.2: U6.24 35.4,28.4 36,29 v43.5,29 | R13.1 62.23,21.12 U9.33 | U4.20 37.25,37.75 39,39.5 v39,40.5 45.5,40.5 48.5,37.5 v48.5,30 | U10.P$8 13.25,39.75 14,40.5 v15.5,40.5 | U5.24 34.6,40.6 v34.5,40.5 | U9.33 62,26.49 62,28.5 60.5,30 v52.5,30 | TP19.P$1 U9.33
  Bottom 0.2: v15.5,40.5 v34.5,40.5 v39,40.5 | v52.5,30 v48.5,30 44.5,30 v43.5,29
TX  (via drill 0.3)
  Top 0.2: U7.20 14.75,49.25 15,49.5 v15,50.5 | U9.35 64.77,28.23 v64.5,28.5
  Bottom 0.2: v15,50.5 16.5,50.5 18,49 53,49 54,48 64,48 64.5,47.5 v64.5,28.5
V_BATT  (via drill 0.4, 0.6, 0.6 pad 0.8)
  Top 0.2: U10.P$2 13.75,36.15 13.73,36.14 13.75,36.12 | C11.1 13.15,35.52 13.75,36.12 | 13.75,36.12 13.87,36 14.13,36 14.25,36.12 U10.P$3
  Top 0.4: U3.3 20.7,33.3 21.15,32.85 C3.1 21.15,30.65 20.5,30 Q3.3 15,31.5 13.15,33.35 C11.1 11.5,35 10.5,36 J2.2 | B4.12 25.32,22.68 v25,23 | B3.12 45.33,22.68 v45,23 | C32.1 29.65,17.65 30,18 30,19.5 30.4,19.9 C31.+ | C30.+ 39.6,19.9 40,19.5 40,18 40.35,17.65 C26.1 | C29.+ 39.6,50.1 40,50.5 40,52 40.35,52.35 C23.1 | C28.+ 30.4,50.1 30,50.5 30,52 29.65,52.35 C20.1 | B1.12 24.68,47.33 25,47 25,46.5 v26,45.5 | B2.12 44.67,46.93 44.79,46.81 44.79,45.79 v44.5,45.5
  Top 0.8: J4.1 | v59.5,66.5 v59.51,66.49 | J7.1 | J6.1 | C22.1 37.05,19.9 C30.+ | C25.1 32.95,19.9 C31.+ | v29,22 29.4,22 C31.+ | C31.+ v31.5,18.5 | v38.5,18.5 C30.+ | C30.+ 40.6,22 v41,22 | C28.+ 32.95,50.1 C5.1 | C29.+ 37.05,50.1 C19.1 | C28.+ v31.5,51.5 | C29.+ v38.5,51.5 | C28.+ 31.5,48.5 v30.5,47.5 | C29.+ 38.5,48.5 v39.5,47.5
  Top 1.2: J2.2 v4.5,36 | v6.5,66.5 J4.1 | v59.51,66.49 J5.1 | v10.5,3.5 J7.1 | v63.5,3.5 J6.1
  Bottom 0.8: v25,23 28,23 v29,22 | v31.5,18.5 31.5,12.5 35,9 38.5,12.5 v38.5,18.5 | v41,22 42,23 v45,23 | v31.5,51.5 31.5,57.5 35,61 38.5,57.5 v38.5,51.5 | v30.5,47.5 28.5,45.5 v26,45.5 | v39.5,47.5 41.5,45.5 v44.5,45.5
  Bottom 1.2: 35,66.5 v6.5,66.5 4.5,64.5 v4.5,36 4.5,5.5 6.5,3.5 v10.5,3.5 35,3.5 | 35,66.5 v59.5,66.5 | 35,3.5 v63.5,3.5 | 35,3.5 35,9 | 35,61 35,66.5
V_USB  (via drill 0.3, 0.35)
  Top 0.2: U7.8 13.25,43.25 13.5,43 v16.5,43
  Top 0.4: D1.A 11,26 | 11,26 R12.2 | U3.4 24.45,34.05 v24.5,34 25.15,33.35 25.25,33.35 | JP1.2 26,34 25.35,33.35 25.25,33.35 | v11.5,31 12.95,31 Q3.1 | v11,27.5 11,26 | v18.5,32.5 D2.A | 25.25,33.35 25.25,32.6 C9.1 | v11.5,40.5 v7.5,44.5 | v7.5,47.5 7.3,47.3 J1.VBUS
  Bottom 0.4: v16.5,43 14,43 v11.5,40.5 v11.5,31 | v11.5,31 17,31 v18.5,32.5 23,32.5 v24.5,34 | v11.5,31 11.5,28 v11,27.5 | v7.5,44.5 v7.5,47.5

## Text on the board
tNames: S1 | M1 | M2 | M3 | M4 | S2 | U1 | S4 | M8 | M7 | M6 | M5 | S3
bNames: Blimpy Board 1.0-B / Immersive Arts Space / ZHdK - Joël Gähwiler | Maximum Ratings / Battery 3A (cum.) / Actors 2A (indv.)